# EAGLE board axiom_beta_plugin_module_1xHDMI_v0.2-default.d8bb6181 (EAGLE 7.7.0)
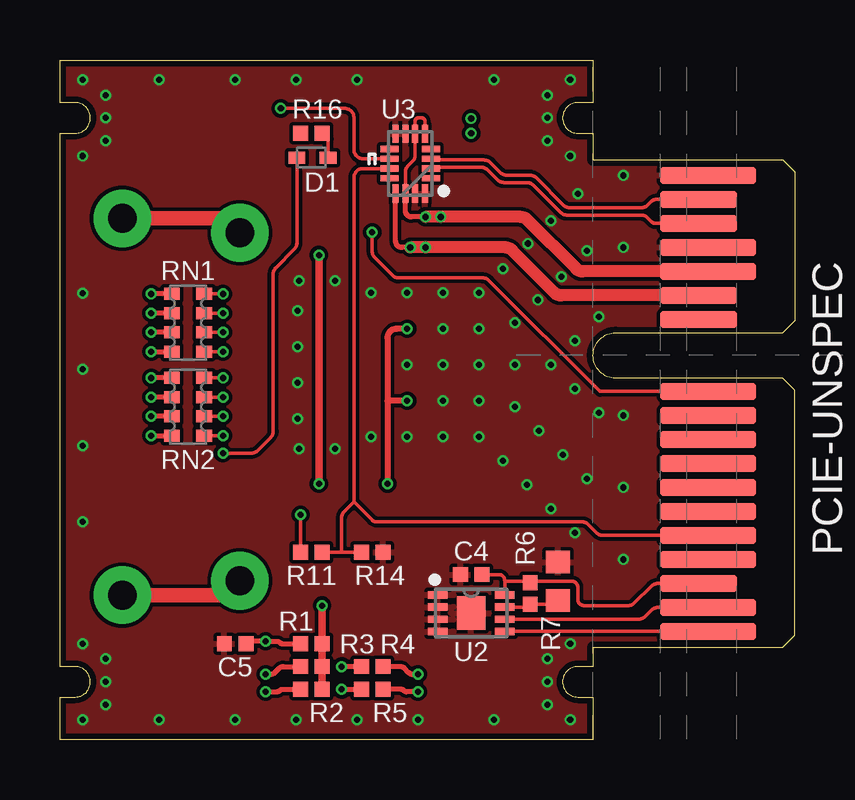
[diagram p0: board, top side]
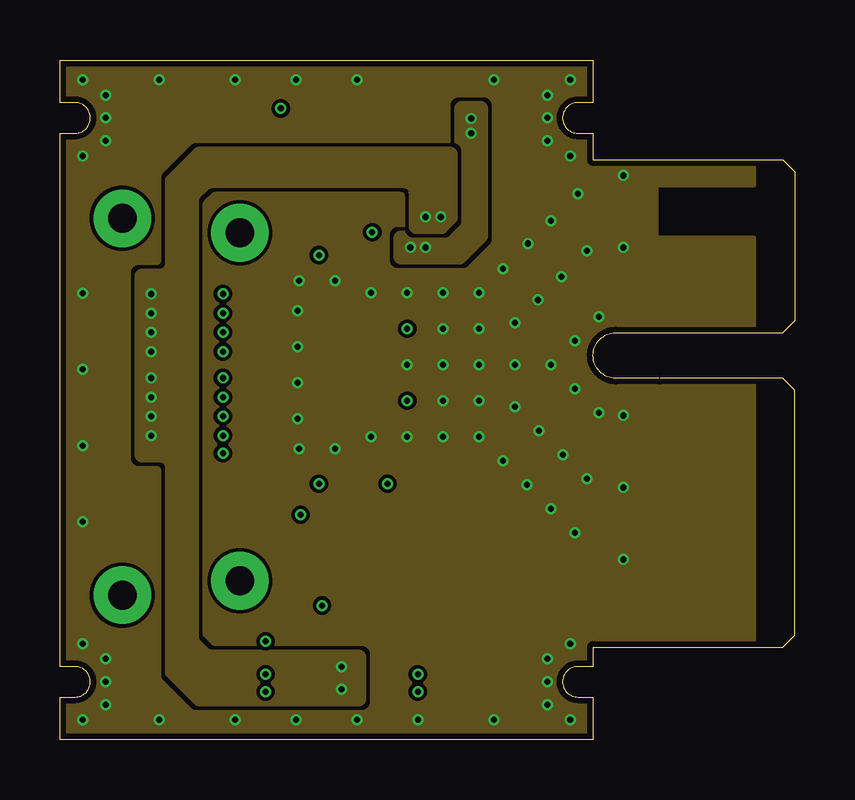
[diagram p1: board, inner layer Route2]
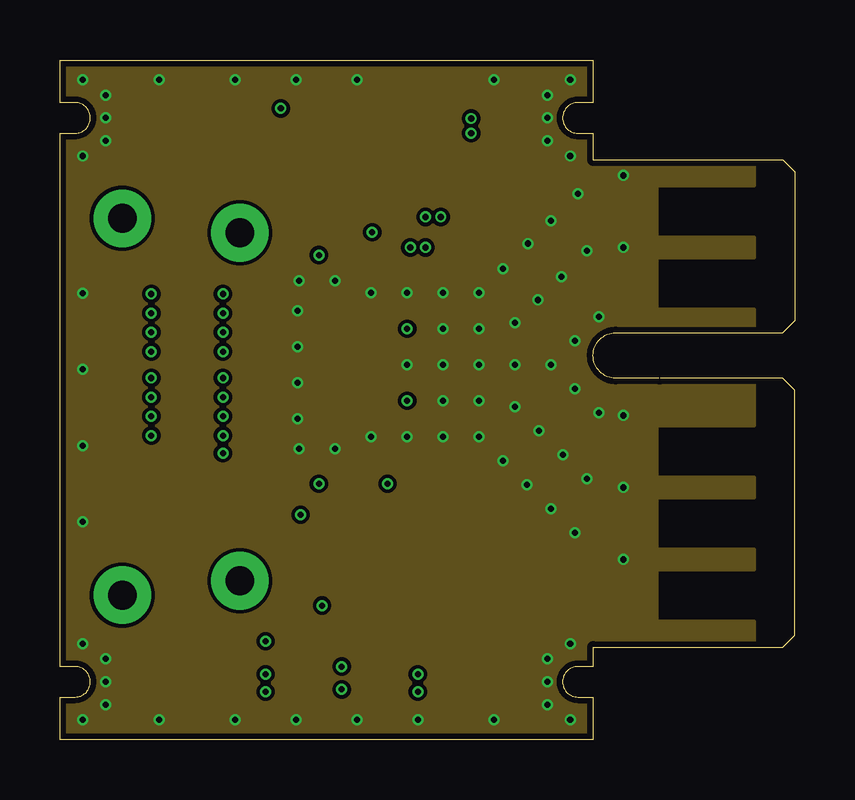
[diagram p2: board, inner layer Route15]
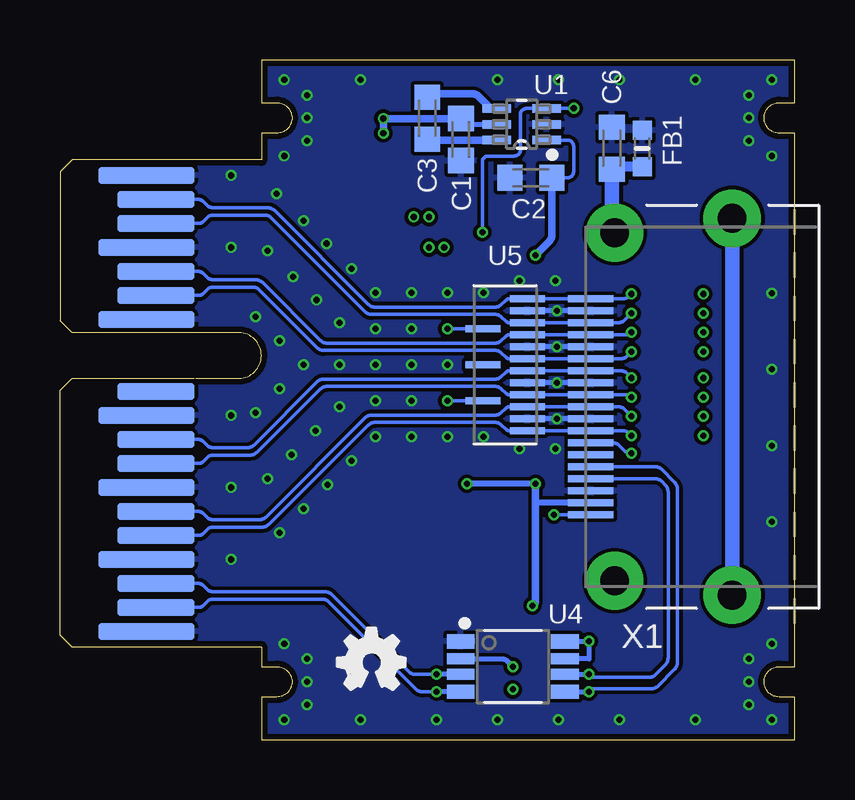
[diagram p3: board, bottom side, seen from below]

Size 30.62 x 28.32 mm. Coordinates in mm from the lower left corner, seen from the top.
Outline: 22.23,24.16 22.23,25.27 21.59,25.27 arc-90 20.96,25.91 arc-90 21.59,26.54 22.23,26.54 22.23,28.32 0,28.32 0,26.54 0.64,26.54 arc-90 1.27,25.91 arc-90 0.64,25.27 0,25.27 0,3.05 0.64,3.05 arc-90 1.27,2.41 arc-90 0.64,1.78 0,1.78 0,0 22.23,0 22.23,1.78 21.59,1.78 arc-90 20.96,2.41 arc-90 21.59,3.05 22.23,3.05 22.23,3.86
Copper layers (1*2*15*16): Top 0.035559375mm / dielectric 0.17018125mm / Route2 0.01778125mm / dielectric 47mil / Route15 0.01778125mm / dielectric 0.17018125mm / Bottom 0.035559375mm
Design rules "OSHPark-4layer-tuned *": minimum track width 5mil, minimum drill 10mil, track to track 6mil, track to pad 5mil, pad to pad 5mil, via to via 5mil, smd to smd 5mil, copper to edge 10mil, drill to drill 6mil, minimum pad ring 4mil, minimum via ring 4mil, stop-mask expansion 2mil, vias tented up to drill 15mil, thermal gap 6mil
Net classes: 0 default: width 0.152 mm, drill 0.254 mm; 1 power: width 0.152 mm, drill 0.254 mm
tKeepout: area -1,24.3 to 2.2,27.5; area -1,0.8 to 2.2,4; area 20,0.8 to 23.2,4; area 20,24.3 to 23.2,27.5
bKeepout: area -1,24.3 to 2.2,27.5; area -1,0.8 to 2.2,4; area 20,0.8 to 23.2,4; area 20,24.3 to 23.2,27.5

## Footprints (pad centres in the part's own frame; a part is rotated, then mirrored left to right if it is on the bottom)
C0603K = smd 1.05 x 1.08: 1 -0.875,0; 2 0.875,0
0402-B = smd 0.62 x 0.62: 1 -0.45,0; 2 0.45,0
SOD523 = smd 0.7 x 0.5: A 0.7,0; C -0.6,0
_0603MP = smd 0.8 x 0.8: 1 -0.762,0; 2 0.762,0
PCIE-36-AXIOM = smd 0.7 x 4 bottom: A1 -11.5,3.6; A4 -8.5,3.6; A7 -5.5,3.6; A10 -2.5,3.6; A12 1.5,3.6; A15 4.5,3.6; A18 7.5,3.6 | smd 0.7 x 3.2 bottom: A2 -10.5,4; A3 -9.5,4; A5 -7.5,4; A6 -6.5,4; A8 -4.5,4; A9 -3.5,4; A11 -1.5,4; A13 2.5,4; A14 3.5,4; A16 5.5,4; A17 6.5,4 | smd 0.7 x 4: B1 -11.5,3.6; B2 -10.5,3.6; B4 -8.5,3.6; B5 -7.5,3.6; B6 -6.5,3.6; B7 -5.5,3.6; B8 -4.5,3.6; B9 -3.5,3.6; B10 -2.5,3.6; B11 -1.5,3.6; B14 3.5,3.6; B15 4.5,3.6; B18 7.5,3.6 | smd 0.7 x 3.2: B3 -9.5,4; B12 1.5,4; B13 2.5,4; B16 5.5,4; B17 6.5,4
0603-B = smd 0.95 x 1: 1 -0.8,0; 2 0.8,0
CAY16 = smd 0.5 x 0.65: 1 -1.2,-0.675; 2 -0.4,-0.675; 3 0.4,-0.675; 4 1.2,-0.675; 5 1.2,0.675; 6 0.4,0.675; 7 -0.4,0.675; 8 -1.2,0.675
SOT65P210X110-6N = smd 1.168 x 0.356: 1 -1.041,0.66; 2 -1.041,0; 3 -1.041,-0.66; 4 1.041,-0.66; 5 1.041,0; 6 1.041,0.66
DFN200X300X100-9N = smd 0.813 x 0.305: 1 -1.397,0.762; 2 -1.397,0.254; 3 -1.397,-0.254; 4 -1.397,-0.762; 5 1.397,-0.762; 6 1.397,-0.254; 7 1.397,0.254; 8 1.397,0.762 | smd 1.194 x 1.397: EP 0,0
QFN40P185X265X55-16N = smd 0.762 x 0.254: 1 -0.864,0.61; 2 -0.864,0.203; 3 -0.864,-0.203; 4 -0.864,-0.61; 9 0.864,-0.61; 10 0.864,-0.203; 11 0.864,0.203; 12 0.864,0.61 | smd 0.254 x 0.762: 5 -0.61,-1.245; 6 -0.203,-1.245; 7 0.203,-1.245; 8 0.61,-1.245; 13 0.61,1.245; 14 0.203,1.245; 15 -0.203,1.245; 16 -0.61,1.245
TSSOP-8 = smd 1.15 x 0.6: 1 -2.175,1.05; 4 -2.175,-1.05; 5 2.175,-1.05; 8 2.175,1.05 | smd 1.15 x 0.45: 2 -2.175,0.325; 3 -2.175,-0.325; 6 2.175,-0.325; 7 2.175,0.325
R-PDSO-N15 = smd 0.3 x 1.45: 1 2.75,0.925; 2 2.25,0.925; 3 1.75,0.925; 4 1.25,0.925; 5 0.75,0.925; 6 0.25,0.925; 7 -0.25,0.925; 8 -0.75,0.925; 9 -1.25,0.925; 10 -1.75,0.925; 11 -2.25,0.925; 12 -2.75,0.925; 13 -1.5,-0.925; 14 0,-0.925; 15 1.5,-0.925
10029449-X01XLF = smd 0.3 x 1.9: 1 4.5,8.5; 2 4,8.5; 3 3.5,8.5; 4 3,8.5; 5 2.5,8.5; 6 2,8.5; 7 1.5,8.5; 8 1,8.5; 9 0.5,8.5; 10 0,8.5; 11 -0.5,8.5; 12 -1,8.5; 13 -1.5,8.5; 14 -2,8.5; 15 -2.5,8.5; 16 -3,8.5; 17 -3.5,8.5; 18 -4,8.5; 19 -4.5,8.5 | drill 1.2 pad 2.4: Z1 -7.25,7.5; Z2 -7.85,2.6; Z3 7.85,2.6; Z4 7.25,7.5

## Placement (x,y rotation side)
C1  [C0603K]  13.92,25.01 270 bottom
C2  [C0603K]  10.99,23.42 180 bottom
C3  [C0603K]  15.31,25.9 90 bottom
C4  [0402-B]  17.15,6.88 180 top
C5  [0402-B]  7.3,4 0 top
C6  [C0603K]  7.62,24.64 90 bottom
D1  [SOD523]  10.48,24.26 0 top
FB1  [_0603MP]  6.35,24.64 90 bottom
LOGO2  OSHW_LOGO_FILLX0100-NT  [OSHW_FILLX100_NOTEXT]  19.05,2.1 0 bottom
PCIE-UNSPEC  PCIE-36-AXIOM  [PCIE-36-AXIOM]  30.62,16.01 90 top
R1  [0402-B]  10.48,4 0 top
R2  [0402-B]  10.48,2.1 0 top
R3  [0402-B]  10.48,3.05 0 top
R4  [0402-B]  13.02,3.05 0 top
R5  [0402-B]  13.02,2.1 0 top
R6  [0402-B]  19.61,6.1 270 top
R7  [0603-B]  20.76,6.6 90 top
R11  [0402-B]  10.48,7.81 0 top
R14  [0402-B]  13.02,7.81 0 top
R16  [0402-B]  10.48,25.27 0 top
RN1  49R9  [CAY16]  5.33,17.37 90 top
RN2  49R9  [CAY16]  5.33,13.87 90 top
U1  REG710P6X  [SOT65P210X110-6N]  11.38,25.64 180 bottom
U2  BR24G04NUX  [DFN200X300X100-9N]  17.15,5.27 0 top
U3  SN74AVC4T774RSV  [QFN40P185X265X55-16N]  14.61,24 180 top
U4  GTL2002DP  [TSSOP-8]  11.75,3.05 0 bottom
U5  TPD8S009  [R-PDSO-N15]  12.07,15.62 270 bottom
U$1  AXIOM_LOGO262X40  [AXIOM_LOGO_262X40]  1.91,9.08 0 top
X1  HDMI-10029449  [10029449-X01XLF]  0,13.87 90 bottom

## Library data of the parts
C1-C3 C6 = rcl
C4 C5 R1-R7 R11 R14 R16 = generic-rcl
D1 = diode
FB1 = microbuilder
LOGO2 = ohw-logo
PCIE-UNSPEC = PCIe
RN1 RN2 = resistor-dil; OC_FARNELL: unknown; OC_NEWARK: unknown
U1 = reg710
U2 = eeprom
U3 = lvltrans
U4 = gtl2002
U5 = esd
U$1 = logos_apertus_axiom
X1 = hdmi

## Nets
+5V: C2.1 R1.2 R2.2 R3.2 U1.1 U5.13 U5.15 X1.18
A_3_N [power]: PCIE-UNSPEC.A16 RN1.3 U5.10 X1.3
A_3_P [power]: PCIE-UNSPEC.A17 RN1.4 U5.12 X1.1
A_5_N [power]: PCIE-UNSPEC.A8 RN2.3 U5.4 X1.9
A_5_P [power]: PCIE-UNSPEC.A9 RN2.4 U5.6 X1.7
A_7_N [power]: PCIE-UNSPEC.A13 RN1.1 U5.7 X1.6
A_7_P [power]: PCIE-UNSPEC.A14 RN1.2 U5.9 X1.4
A_9_N [power]: PCIE-UNSPEC.A5 RN2.1 U5.1 X1.12
A_9_P [power]: PCIE-UNSPEC.A6 RN2.2 U5.3 X1.10
B_2_N: PCIE-UNSPEC.A2 R5.2 U4.4
B_2_P: PCIE-UNSPEC.A3 R4.2 U4.3
EN: PCIE-UNSPEC.B11 U1.3 U3.10
GND: C1.2 C2.2 C4.2 C5.1 C6.2 FB1.2 PCIE-UNSPEC.A1 PCIE-UNSPEC.A4 PCIE-UNSPEC.A7 PCIE-UNSPEC.A10 PCIE-UNSPEC.A12 PCIE-UNSPEC.A15 PCIE-UNSPEC.A18 PCIE-UNSPEC.B15 PCIE-UNSPEC.B18 R7.2 R14.2 U1.2 U2.1 U2.2 U2.3 U2.4 U2.EP U3.7 U3.8 U3.15 U3.16 U4.1 U5.2 U5.5 U5.8 U5.11 X1.2 X1.5 X1.8 X1.11 X1.17
HDMI_CEC: D1.C X1.13
HDMI_HP: R11.1 X1.19
HDMI_SCL: R2.1 U4.5 X1.15
HDMI_SDA: R3.1 U4.6 X1.16
HDMI_U: X1.14
HP: PCIE-UNSPEC.B5 R11.2 R14.1 U3.11
I2C_V: C4.1 PCIE-UNSPEC.B3 R6.1 U2.8
JX2_18_N [power]: PCIE-UNSPEC.B17 U3.3
JX2_18_P [power]: PCIE-UNSPEC.B16 U3.2
N$1: C3.1 U1.6
N$5: C3.2 U1.4
N$12: R6.2 R7.1 U2.7
N$15: C6.1 FB1.1 X1.Z1 X1.Z2 X1.Z3 X1.Z4
N$18: D1.A R16.2
N$45: C5.2 R1.1 U4.7 U4.8
N$209: PCIE-UNSPEC.A11
N$214: PCIE-UNSPEC.B4
N$216: PCIE-UNSPEC.B6
N$218: PCIE-UNSPEC.B8
N$220: PCIE-UNSPEC.B10
N$243: PCIE-UNSPEC.B9
N$247: PCIE-UNSPEC.B7
PCIE_5V: PCIE-UNSPEC.B12
PCIE_VCC: C1.1 PCIE-UNSPEC.B13 U1.5 U3.13
PCIE_VCCIO: PCIE-UNSPEC.B14 R4.1 R5.1 RN1.5 RN1.6 RN1.7 RN1.8 RN2.5 RN2.6 RN2.7 RN2.8 U3.5 U3.6 U3.14 U4.2
SCL: PCIE-UNSPEC.B2 U2.6
SDA: PCIE-UNSPEC.B1 U2.5
VCC: R16.1

## Tracks (layer width: path | path; a pad name or v marks a point on that pad's centre or on a via)
+5V  (via drill 0.25)
  Top 0.254: v14.48,17.12 14.03,17.12 arc90 13.65,16.74 13.65,14.12 | 13.65,14.12 v13.65,10.67 | v14.48,14.12 13.65,14.12
  Top 0.305: v10.8,10.67 v10.8,20.19 | R2.2 R3.2 R1.2 v10.93,5.59
  Bottom 0.152: U5.13 v14.48,17.12 | U5.15 v14.48,14.12 | C2.1 9.46,23.42 arc-90 9.21,23.68 9.21,24.73 arc-90 9.46,24.98 U1.1
  Bottom 0.254: X1.18 10.8,9.87 | v10.8,10.67 v13.65,10.67
  Bottom 0.305: v10.8,20.19 10.23,20.76 arc-45 10.12,21.03 C2.1 | v10.8,10.67 10.8,9.87 10.8,5.72 v10.93,5.59
A_3_N  (via drill 0.25)
  Top 0.152: RN1.3 v6.8,17.77
  Bottom 0.152: v6.8,17.77 7.08,17.48 arc45 7.35,17.37 X1.3 U5.10 11.87,17.37 arc45 12.05,17.45 12.21,17.61 arc-45 12.48,17.72 17.63,17.72 arc45 17.9,17.83 21.81,21.75 arc-45 22.08,21.86 24.23,21.86 arc-45 24.5,21.75 24.66,21.58 arc45 24.84,21.51 PCIE-UNSPEC.A16
A_3_P  (via drill 0.25)
  Top 0.152: RN1.4 v6.8,18.57
  Bottom 0.152: v6.8,18.57 6.88,18.48 arc45 7.15,18.37 X1.1 U5.12 11.87,18.37 arc-45 12.05,18.3 12.21,18.14 arc45 12.48,18.03 17.5,18.03 arc45 17.77,18.14 21.69,22.05 arc-45 21.96,22.16 24.23,22.16 arc45 24.5,22.27 24.66,22.44 arc-45 24.84,22.51 PCIE-UNSPEC.A17
A_5_N  (via drill 0.25)
  Top 0.152: RN2.3 v6.8,14.27
  Bottom 0.152: v6.8,14.27 arc-45 7.04,14.37 X1.9 U5.4 11.87,14.37 arc45 12.05,14.45 12.21,14.61 arc-45 12.48,14.72 19.5,14.72 arc-45 19.77,14.61 22.41,11.97 arc45 22.68,11.86 24.23,11.86 arc-45 24.5,11.75 24.66,11.58 arc45 24.84,11.51 PCIE-UNSPEC.A8
A_5_P  (via drill 0.25)
  Top 0.152: RN2.4 v6.8,15.07
  Bottom 0.152: v6.8,15.07 6.98,15.26 arc-45 7.25,15.37 X1.7 U5.6 11.87,15.37 arc-45 12.05,15.3 12.21,15.14 arc45 12.48,15.02 19.63,15.02 arc-45 19.9,14.91 22.54,12.27 arc45 22.81,12.16 24.23,12.16 arc45 24.5,12.27 24.66,12.44 arc-45 24.84,12.51 PCIE-UNSPEC.A9
A_7_N  (via drill 0.25)
  Top 0.152: RN1.1 v6.8,16.17
  Bottom 0.152: v6.8,16.17 6.98,15.98 arc45 7.25,15.87 X1.6 U5.7 11.87,15.87 arc45 12.05,15.95 12.21,16.11 arc-45 12.48,16.22 19.63,16.22 arc45 19.9,16.33 22.31,18.75 arc-45 22.58,18.86 24.23,18.86 arc-45 24.5,18.75 24.66,18.58 arc45 24.84,18.51 PCIE-UNSPEC.A13
A_7_P  (via drill 0.25)
  Top 0.152: RN1.2 v6.8,16.97
  Bottom 0.152: v6.8,16.97 6.9,16.87 X1.4 U5.9 11.87,16.87 arc-45 12.05,16.8 12.21,16.64 arc45 12.48,16.53 19.5,16.53 arc45 19.77,16.64 22.19,19.05 arc-45 22.46,19.16 24.23,19.16 arc45 24.5,19.27 24.66,19.44 arc-45 24.84,19.51 PCIE-UNSPEC.A14
A_9_N  (via drill 0.25)
  Top 0.152: RN2.1 v6.8,12.67
  Bottom 0.152: v6.8,12.67 6.88,12.76 arc-45 7.15,12.87 X1.12 U5.1 11.87,12.87 arc45 12.05,12.95 12.21,13.11 arc-45 12.48,13.22 17.5,13.22 arc-45 17.77,13.11 21.91,8.97 arc45 22.18,8.86 24.23,8.86 arc-45 24.5,8.75 24.66,8.58 arc45 24.84,8.51 PCIE-UNSPEC.A5
A_9_P  (via drill 0.25)
  Top 0.152: RN2.2 v6.8,13.47
  Bottom 0.152: v6.8,13.47 7.08,13.76 arc-45 7.35,13.87 X1.10 U5.3 11.87,13.87 arc-45 12.05,13.8 12.21,13.64 arc45 12.48,13.52 17.63,13.52 arc-45 17.9,13.41 22.04,9.27 arc45 22.31,9.16 24.23,9.16 arc45 24.5,9.27 24.66,9.44 arc-45 24.84,9.51 PCIE-UNSPEC.A6
B_2_N  (via drill 0.25)
  Top 0.203: v14.92,2 14.44,2 arc-45 14.35,2.04 14.33,2.06 arc45 14.24,2.1 R5.2
  Bottom 0.152: PCIE-UNSPEC.A2 24.84,5.51 arc-45 24.66,5.58 24.5,5.75 arc45 24.23,5.86 19.69,5.86 arc45 19.42,5.75 15.79,2.11 arc-45 15.52,2 v14.92,2
  Bottom 0.203: U4.4 v14.92,2
B_2_P  (via drill 0.25)
  Top 0.203: v14.92,2.72 14.72,2.72 arc-45 14.54,2.8 14.36,2.97 arc45 14.18,3.05 R4.2
  Bottom 0.152: PCIE-UNSPEC.A3 24.84,6.51 arc45 24.66,6.44 24.5,6.27 arc-45 24.23,6.16 19.57,6.16 arc45 19.3,6.05 16.08,2.83 arc-45 15.81,2.72 v14.92,2.72
  Bottom 0.203: U4.3 v14.92,2.72
EN  (via drill 0.25)
  Top 0.152: U3.10 12.64,24.21 arc-90 12.26,24.59 12.26,25.92 arc90 11.87,26.3 v9.21,26.3 | PCIE-UNSPEC.B11 22.51,14.51 17.89,19.13 arc45 17.62,19.24 14.13,19.24 arc-45 13.86,19.35 13.13,20.08 arc-45 13.02,20.35 v13.02,21.15
  Bottom 0.152: v9.21,26.3 U1.3 11.18,26.3 arc-90 11.43,26.05 11.43,24.57 arc90 11.68,24.32 12.76,24.32 arc-90 13.02,24.07 v13.02,21.15
GND  (via drill 0.25)
  Bottom 0.203: X1.2 v9.91,17.87 U5.11 | X1.5 v9.91,16.37 U5.8 | X1.8 v9.91,14.87 U5.5 | X1.11 v9.91,13.37 U5.2
  Bottom 0.406: 14.22,4.1 U4.1
  other vias: 0.95,27.5 21.27,27.5 21.27,0.83 0.95,0.83 23.5,23.51 23.5,20.51 23.5,13.51 23.5,10.51 23.5,7.51 14.48,15.62 17.46,15.62 17.46,17.12 17.46,14.12 17.46,12.62 17.46,18.62 14.48,12.62 15.96,12.62 14.48,18.62 15.96,18.62 15.96,17.12 15.96,15.62 15.96,14.12 18.46,11.62 18.46,19.62 18.96,15.62 18.96,17.37 19.92,18.32 20.9,19.3 21.98,20.37 19.98,12.87 20.98,11.87 18.96,13.87 21.98,10.87 20.46,15.62 21.46,16.62 21.46,14.62 22.46,13.62 22.46,17.62 19.46,10.62 20.46,9.62 21.46,8.62 19.51,20.67 20.46,21.62 21.59,22.75 12.98,12.62 12.98,18.62 11.48,12.12 11.48,19.12 9.98,19.12 9.98,12.12 4.13,27.5 18.1,27.5 4.13,0.83 0.95,4 0.95,24.32 1.91,24.96 21.27,24.32 18.1,0.83 21.27,4 7.3,27.5 9.84,27.5 12.38,27.5 0.95,15.43 0.95,12.26 0.95,9.08 0.95,18.61 1.91,26.86 20.32,24.96 20.32,26.86 1.91,1.46 1.91,3.37 20.32,3.37 20.32,1.46 9.84,0.83 12.38,0.83 7.3,0.83 14.92,0.83 1.91,2.41 20.32,2.41 20.32,25.91 1.91,25.91
  pour Bottom (isolate 0.152): 0,28.45 22.23,28.45 22.23,24.26 25.4,24.26 25.4,3.76 22.23,3.76 22.23,-0.13 0,-0.13
  pour Top (isolate 0.152): 0,28.45 22.23,28.45 22.23,24.26 25.4,24.26 25.4,3.76 22.23,3.76 22.23,-0.13 0,-0.13
  pour Route2 (isolate 0.152, rank 3): 0,28.45 22.23,28.45 22.23,24.26 28.96,24.26 28.96,23.09 24.89,23.09 24.89,20.93 28.96,20.93 28.96,3.76 22.23,3.76 22.23,-0.13 0,-0.13
  pour Route15 (isolate 0.152, rank 3): 0,28.45 22.23,28.45 22.23,24.26 28.96,24.26 28.96,23.09 24.89,23.09 24.89,20.93 28.96,20.93 28.96,20.09 24.89,20.09 24.89,17.93 28.96,17.93 28.96,13.09 24.89,13.09 24.89,10.93 28.96,10.93 28.96,10.09 24.89,10.09 24.89,7.93 28.96,7.93 28.96,7.09 24.89,7.09 24.89,4.93 28.96,4.93 28.96,3.76 22.23,3.76 22.23,-0.13 0,-0.13
HDMI_CEC  (via drill 0.25)
  Top 0.152: v6.8,11.94 7.97,11.94 arc45 8.24,12.05 8.78,12.59 arc45 8.89,12.86 8.89,19.4 arc-45 9,19.67 9.77,20.43 arc45 9.88,20.7 D1.C
  Bottom 0.152: X1.13 7.58,12.37 arc45 7.31,12.26 7.1,12.05 arc-45 6.83,11.94 v6.8,11.94
HDMI_HP  (via drill 0.25)
  Top 0.152: R11.1 v10.03,9.37
  Bottom 0.152: X1.19 v10.03,9.37
HDMI_SCL  (via drill 0.25)
  Top 0.203: v8.57,2 9.06,2 arc45 9.15,2.04 9.17,2.06 arc-45 9.26,2.1 R2.1
  Bottom 0.152: X1.15 5.81,11.37 arc45 5.54,11.26 5,10.72 arc45 4.89,10.45 4.89,3.21 arc45 5,2.94 5.7,2.24 arc45 5.97,2.12 8.45,2.12 v8.57,2
  Bottom 0.203: U4.5 v8.57,2
HDMI_SDA  (via drill 0.25)
  Top 0.203: v8.57,2.72 8.78,2.72 arc45 8.96,2.8 9.13,2.97 arc-45 9.31,3.05 R3.1
  Bottom 0.152: X1.16 5.81,10.87 arc45 5.54,10.76 5.38,10.6 arc45 5.27,10.33 5.27,3.4 arc45 5.38,3.13 5.8,2.71 arc45 6.07,2.6 8.45,2.6 v8.57,2.72
  Bottom 0.203: U4.6 v8.57,2.72
HP
  Top 0.152: R11.2 11.75,7.81 | 11.75,7.81 R14.1 | 11.75,7.81 11.75,7.82 11.75,9.29 arc-45 11.82,9.47 12.26,9.91 | 12.26,9.91 12.26,23.42 arc-90 12.64,23.8 U3.11 | PCIE-UNSPEC.B5 22.64,8.51 arc-45 22.37,8.62 22.02,8.97 arc45 21.75,9.08 13.19,9.08 arc-45 13.01,9.15 12.26,9.91
I2C_V
  Top 0.152: 19.61,6.6 21.34,6.6 arc-90 21.59,6.35 21.59,5.84 arc90 21.84,5.59 23.69,5.59 arc45 23.96,5.7 24.65,6.4 arc-45 24.92,6.51 PCIE-UNSPEC.B3 | 19.61,6.6 18.54,6.6 | U2.8 18.54,6.6 | 18.54,6.6 18.54,6.63 arc90 18.29,6.88 C4.1 | R6.1 19.61,6.6
JX2_18_N
  Top 0.152: PCIE-UNSPEC.B17 24.84,22.51 arc45 24.66,22.44 24.5,22.27 arc-45 24.23,22.16 21.26,22.16 arc-45 21,22.27 19.86,23.41 arc45 19.59,23.52 18.64,23.52 arc-45 18.37,23.63 17.96,24.04 arc45 17.69,24.16 15.56,24.16 15.51,24.21 U3.3
JX2_18_P
  Top 0.152: PCIE-UNSPEC.B16 24.84,21.51 arc-45 24.66,21.58 24.5,21.75 arc45 24.23,21.86 21.14,21.86 arc-45 20.87,21.97 19.73,23.1 arc45 19.46,23.22 18.51,23.22 arc-45 18.24,23.33 17.83,23.74 arc45 17.56,23.85 15.56,23.85 15.51,23.8 U3.2
N$1
  Bottom 0.305: U1.6 15.27,24.98 C3.1
N$5
  Bottom 0.305: U1.4 12.67,26.3 13.17,26.8 arc-45 13.44,26.91 15.17,26.91 C3.2
N$12
  Top 0.152: U2.7 19.48,5.53 R6.2 20.61,5.65 R7.1
N$15
  Top 0.61: X1.Z2 6.74,6.02 arc45 7.01,6.13 X1.Z1 | X1.Z3 6.74,21.72 arc-45 7.01,21.61 X1.Z4
  Bottom 0.406: FB1.1 7.62,23.88 C6.1
  Bottom 0.61: C6.1 7.62,21.24 X1.Z4 | X1.Z3 X1.Z2
N$18
  Top 0.152: D1.A 11.18,25.02 R16.2
N$45  (via drill 0.25)
  Top 0.203: R1.1 9.26,4 arc-45 9.17,4.04 9.15,4.06 arc45 9.06,4.1 v8.57,4.1 7.85,4.1 C5.2
  Bottom 0.203: U4.8 v8.57,4.1 8.57,3.37 U4.7
PCIE_VCC  (via drill 0.25)
  Top 0.203: v14.61,20.51 14.25,20.51 arc-90 14,20.77 U3.13
  Top 0.508: PCIE-UNSPEC.B13 20.89,18.51 arc-45 20.62,18.62 18.84,20.4 arc45 18.58,20.51 v15.24,20.51 v14.61,20.51
  Bottom 0.203: C1.1 13.68,25.64 U1.5
  Bottom 0.305: C1.1 v17.15,25.88 v17.15,25.27
  pour Route2 (rank 2): 16.51,26.29 16.51,21.76 arc-45 16.44,21.58 16.08,21.22 arc-45 15.9,21.15 14.22,21.15 arc90 13.97,20.89 13.97,20.13 arc90 14.22,19.88 16.66,19.88 arc45 16.84,19.95 17.71,20.82 arc45 17.78,21 17.78,26.29 arc90 17.53,26.54 16.76,26.54 arc90
PCIE_VCCIO  (via drill 0.25)
  Top 0.152: U3.14 14.4,23.64 arc-45 14.51,23.91 14.7,24.1 arc45 14.81,24.36 U3.6 14.81,25.78 arc-90 14.94,25.91 15.09,25.91 arc-90 15.22,25.78 U3.5
  Top 0.203: v15.24,21.78 14.66,21.78 arc-90 14.4,22.04 U3.14 | R4.1 v11.75,3.05 | v11.75,2.1 R5.1 | RN1.5 v3.81,18.57 | v3.81,16.17 RN1.8 | RN2.5 v3.81,15.07 | v3.81,12.67 RN2.8 | RN1.6 v3.81,17.77 | RN1.7 v3.81,16.97 | RN2.6 v3.81,14.27 | RN2.7 v3.81,13.47
  Top 0.508: PCIE-UNSPEC.B14 21.8,19.51 arc-45 21.53,19.62 19.48,21.67 arc45 19.21,21.78 v15.88,21.78 v15.24,21.78
  Bottom 0.203: U4.2 12.23,3.37 arc45 11.96,3.26 v11.75,3.05
  pour Route2: 5.71,4.3 5.71,22.44 arc-45 5.79,22.62 6.15,22.98 arc-45 6.33,23.05 14.35,23.05 arc-90 14.61,22.8 14.61,21.4 arc90 14.86,21.15 15.9,21.15 arc45 16.08,21.22 16.44,21.58 arc45 16.51,21.76 16.51,24.38 arc90 16.26,24.64 5.82,24.64 arc45 5.64,24.56 4.52,23.44 arc45 4.45,23.26 4.45,19.81 arc-90 4.19,19.56 3.43,19.56 arc90 3.18,19.3 3.18,11.87 arc90 3.43,11.62 4.19,11.62 arc-90 4.45,11.37 4.45,2.84 arc45 4.52,2.66 5.64,1.53 arc45 5.82,1.46 12.45,1.46 arc90 12.7,1.71 12.7,3.43 arc90 12.45,3.68 6.33,3.68 arc-45 6.15,3.76 5.79,4.12 arc-45
SCL
  Top 0.152: PCIE-UNSPEC.B2 24.92,5.51 arc45 24.65,5.4 24.38,5.13 arc-45 24.11,5.02 U2.6
SDA
  Top 0.152: U2.5 PCIE-UNSPEC.B1

## Text on the board
tDocu: HIGH SPEED IO
_tSilk: V0.2 / R1.0
_bSilk: Copyright / (C) 2015 H.Poetzl / Licensed under / CERN OHL v.1.2